# EAGLE board Proiect_TSC_board (EAGLE 9.7.0)
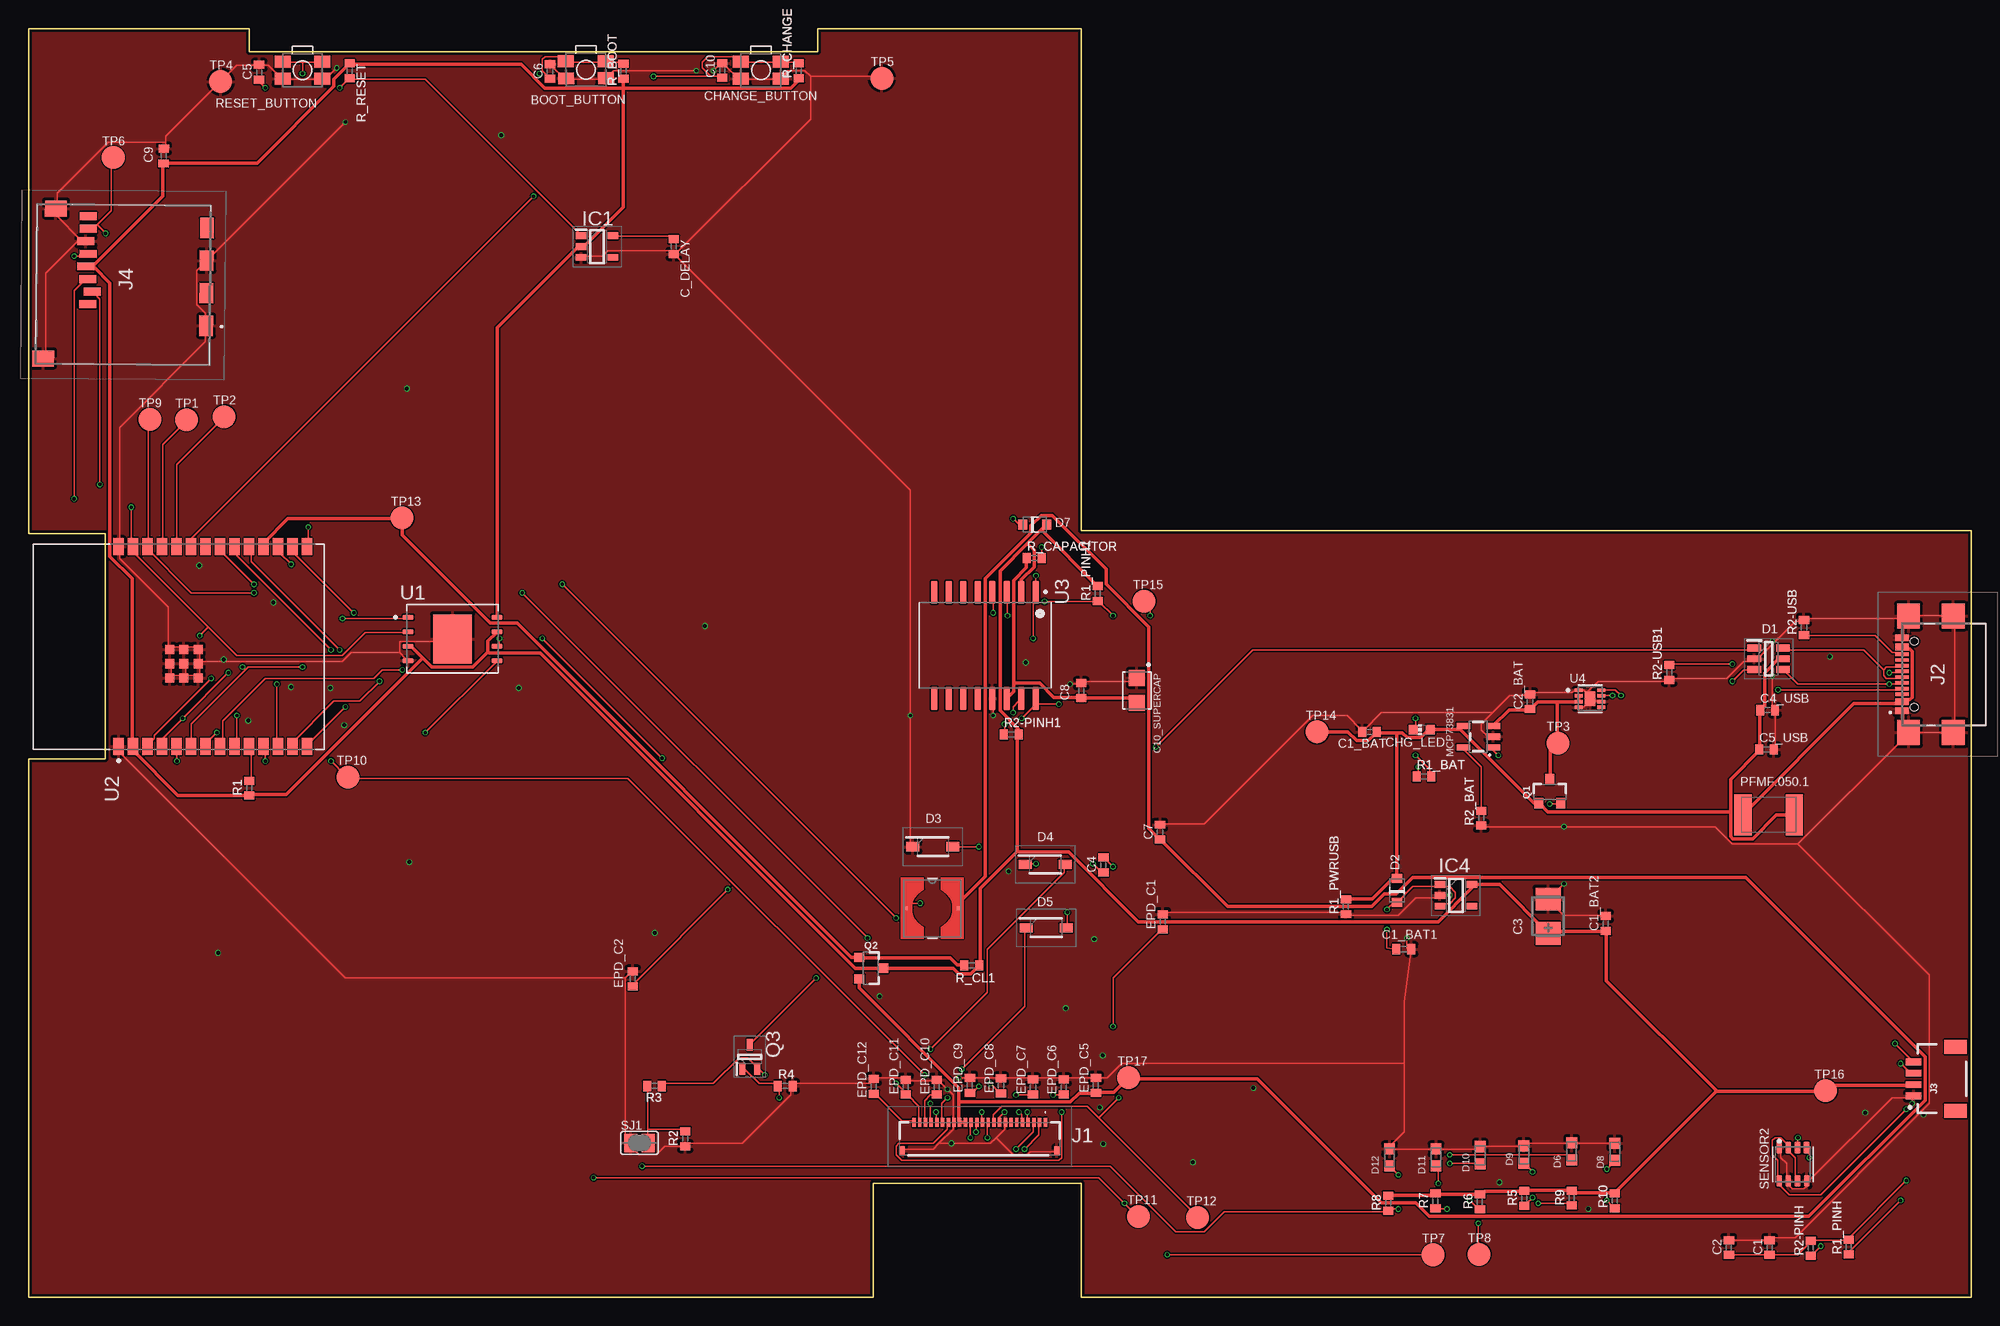
[diagram p0: board, top side]
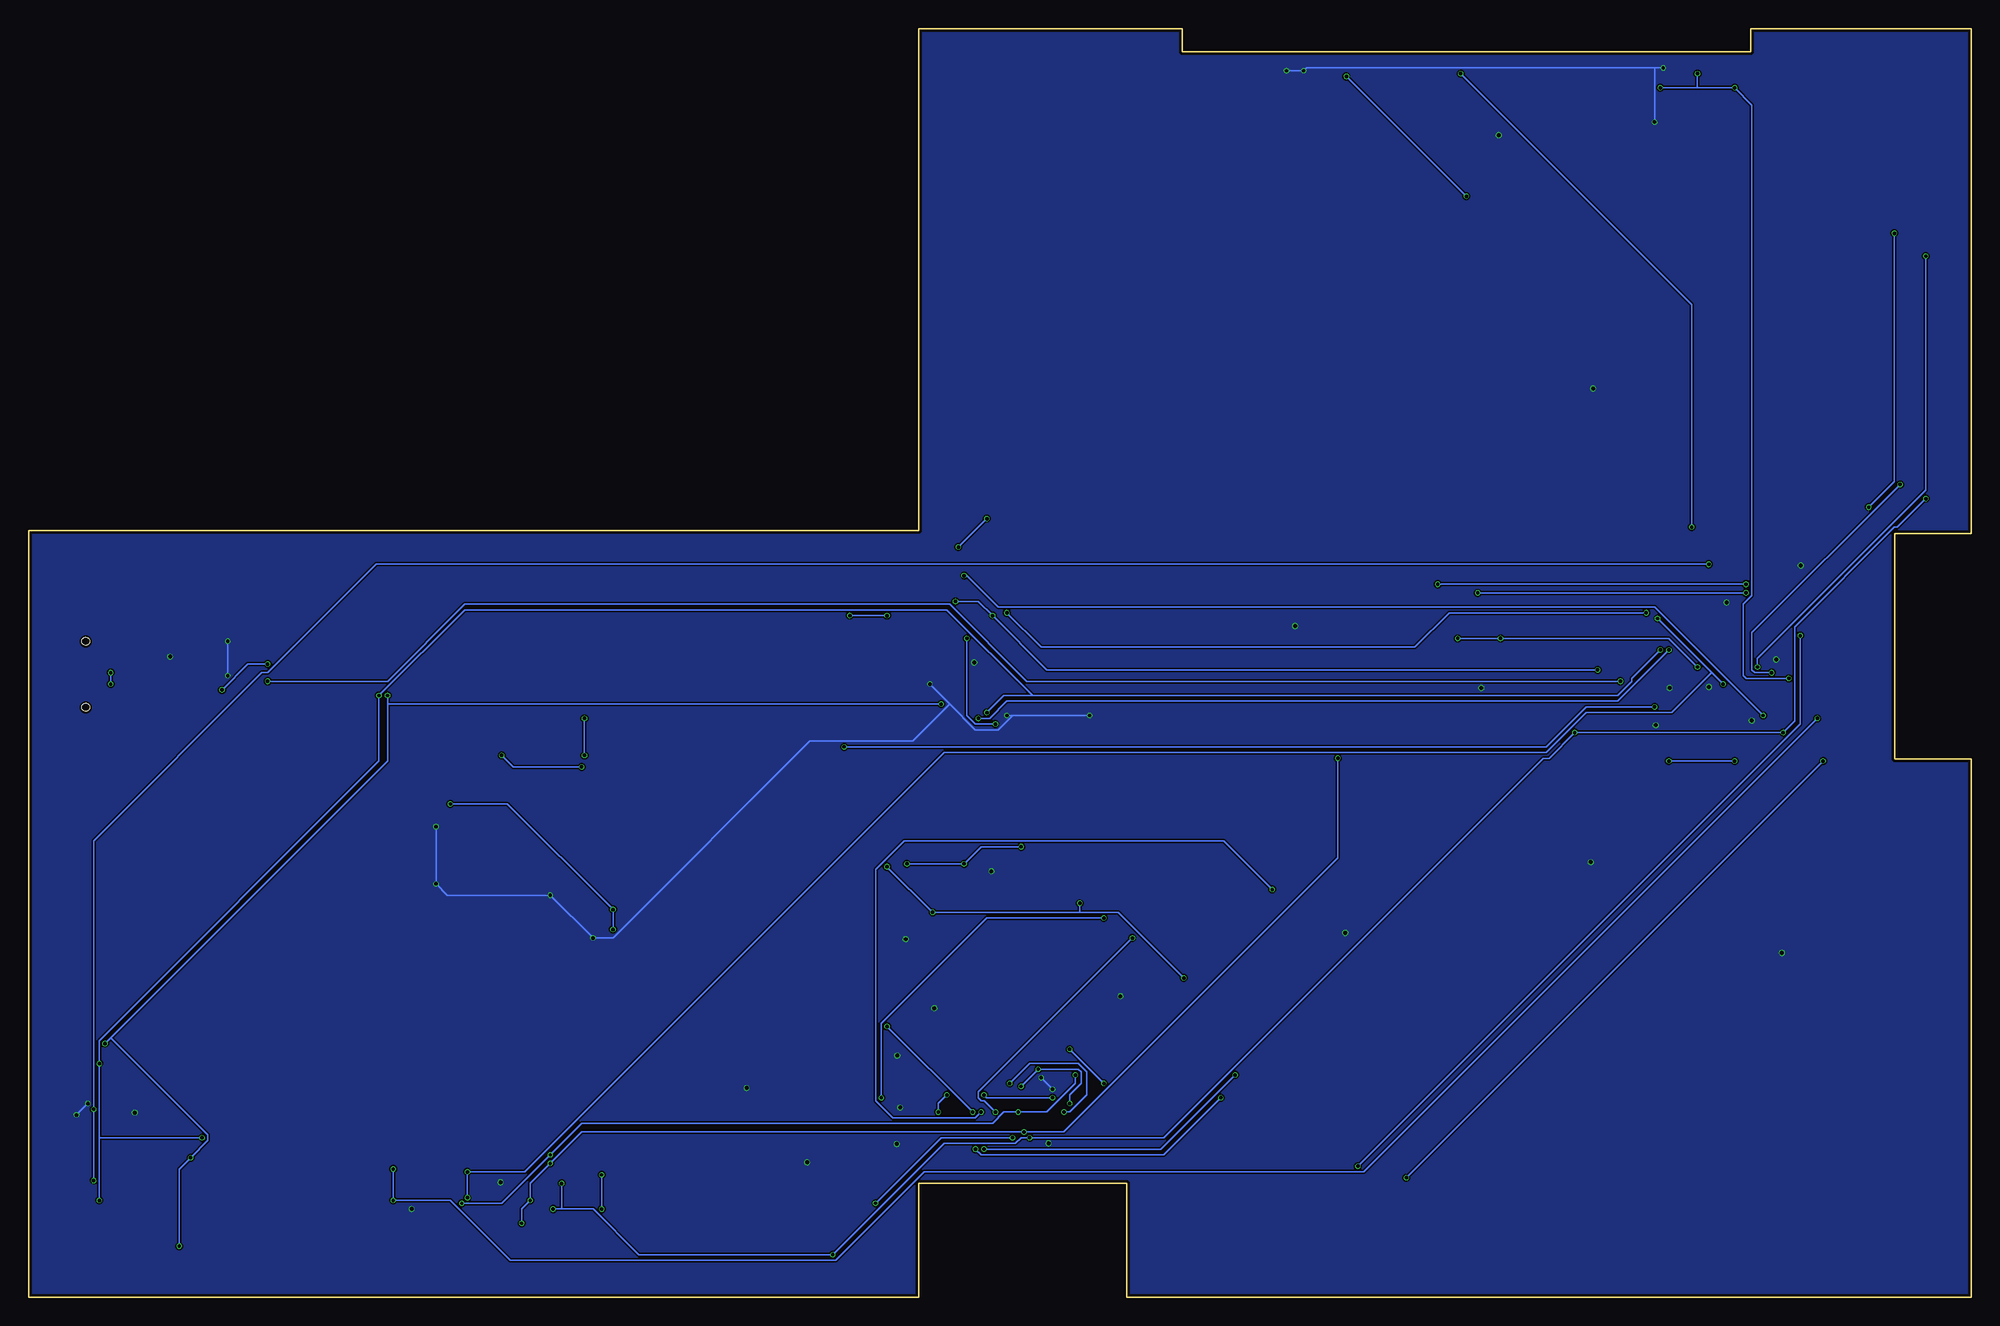
[diagram p1: board, bottom side, seen from below]

Size 170.2 x 111.2 mm. Coordinates in mm from the lower left corner, seen from the top.
Outline: 0,0 74,0 74,10 92.2,10 92.2,0 170.2,0 170.2,67.2 92.2,67.2 92.2,111.2 69.15,111.2 69.15,109.15 19.35,109.15 19.35,111.2 0,111.2 0,66.95 6.7,66.95 6.7,47.2 0,47.2 0,0
Copper layers (1*16): Top 0.035mm / dielectric 1.6mm / Bottom 0.035mm
Design rules "jlcpcb-2layers.dru *": minimum track width 5mil, minimum drill 0.3mm, track to track 5mil, track to pad 5mil, pad to pad 5mil, via to via 5mil, smd to smd 5mil, copper to edge 0.2mm, drill to drill 6mil, minimum pad ring 10mil, minimum via ring 3mil, stop-mask expansion 4mil, vias tented up to drill 0mil, thermal gap 10mil
Net classes: 0 default: width 0.15 mm; 1 POWER: width 0.3 mm

## Footprints (pad centres in the part's own frame; a part is rotated, then mirrored left to right if it is on the bottom)
MYBUTTON = smd 1.4 x 1.05: 1 1.75,0.75; 2 -1.75,0.75; 3 -1.75,-0.75; 4 1.75,-0.75
ESP32_WROVER_EAGLE-LTSPICE_C0402 = smd 0.7 x 0.9: 1 -0.65,0; 2 0.65,0
RCL_CT3528 = smd 2 x 2.2: + -1.5,0; - 1.5,0
CAPCP3225X100N = smd 1.4 x 1.4: 1 -1.1,0; 2 1.1,0
ADAFRUIT_CHIP-LED0603 = smd 0.8 x 0.8: A 0,-0.75; C 0,0.75
SOT95P280X145-6N = smd 1.2 x 0.6: 1 -1.25,0.95; 2 -1.25,0; 3 -1.25,-0.95; 4 1.25,-0.95; 5 1.25,0; 6 1.25,0.95
ESP32_WROVER_AVX---SD0805S020S1R0_AVX_SD0805S020S1R0_0 = smd 0.8 x 0.9: 1 -1.05,0; 2 1.05,0
SOD3716X135N = smd 1.15 x 0.8: 1 -1.75,0; 2 1.75,0
DIOC1608X36N = smd 0.97 x 0.94: 1 -0.75,0; 2 0.75,0
SOT95P280X125-5N = smd 0.9 x 0.6: 1 -1.4,0.95; 2 -1.4,0; 3 -1.4,-0.95; 4 1.4,-0.95; 5 1.4,0.95
SOT95P280X120-5N = smd 0.9 x 0.6: 1 -1.4,0.95; 2 -1.4,0; 3 -1.4,-0.95; 4 1.4,-0.95; 5 1.4,0.95
FH34SRJ24S05SH99 = smd 0.3 x 0.8: 1 5.75,1.45; 2 5.25,1.45; 3 4.75,1.45; 4 4.25,1.45; 5 3.75,1.45; 6 3.25,1.45; 7 2.75,1.45; 8 2.25,1.45; 9 1.75,1.45; 10 1.25,1.45; 11 0.75,1.45; 12 0.25,1.45; 13 -0.25,1.45; 14 -0.75,1.45; 15 -1.25,1.45; 16 -1.75,1.45; 17 -2.25,1.45; 18 -2.75,1.45; 19 -3.25,1.45; 20 -3.75,1.45; 21 -4.25,1.45; 22 -4.75,1.45; 23 -5.25,1.45; 24 -5.75,1.45 | smd 0.4 x 0.8: MP1 6.75,-1.05; MP2 -6.75,-1.05
SAMACSYS_PARTS_USB4110GFA = smd 0.3 x 1.15: A1 -3.35,3.678; A4 -2.55,3.678; A5 -1.25,3.678; A6 -0.25,3.678; A7 0.25,3.678; A8 1.25,3.678; A9 2.55,3.678; A12 3.35,3.678; B1 3.05,3.678; B4 2.25,3.678; B5 1.75,3.678; B6 0.75,3.678; B7 -0.75,3.678; B8 -1.75,3.678; B9 -2.25,3.678; B12 -3.05,3.678 | smd 2.18 x 2: MP1 -5.11,-0.827; MP2 5.11,-0.827; MP3 -5.11,3.103; MP4 5.11,3.103 | hole 0.65: -2.89,2.603; 2.89,2.603
JST04_1MM_RA = smd 0.6 x 1.35: 1 -1.5,0; 2 -0.5,0; 3 0.5,0; 4 1.5,0 | smd 1.2 x 2: NC1 2.8,-3.675; NC2 -2.8,-3.675
112ATAARR03ATTEND = smd 1.8 x 1.2: G1 10.6,10.4; G2 4.9,10.4; S1 7.75,10.4; S2 2.05,10.4 | smd 1.4 x 1.9: G3 13.6,-3.85; G4 0.45,-2.85 | smd 0.7 x 1.5: P1 8.8,0; P2 7.7,0.4; P3 6.6,0; P4 5.5,-0.2; P5 4.4,0; P6 3.3,-0.2; P7 2.2,0; P8 1.1,0
IND_4828-WE-TPC_WRE = smd 0.3 x 0.3: 1 -2.286,0; 2 2.286,0
ESP32_WROVER_SPARKFUN-IC-POWER_SOT23-5 = smd 0.55 x 1.2: 1 -0.95,-1.3; 2 0,-1.3; 3 0.95,-1.3; 4 0.95,1.3; 5 -0.95,1.3
ESP32C6_VARISTOR_CT/CN1812 = smd 1.5 x 3.6: 1 -2.25,0; 2 2.25,0
ESP32_WROVER_SPARKFUN-DISCRETESEMI_SOT23-3 = smd 0.8 x 0.9: 1 -0.95,-1; 2 0.95,-1; 3 0,1.1
SOT65P210X110-3N = smd 1.05 x 0.5: 1 -1.05,0.65; 2 -1.05,-0.65; 3 1.05,0
ESP32_WROVER_EAGLE-LTSPICE_R0402 = smd 0.7 x 0.9: 1 -0.65,0; 2 0.65,0
ESP32_WROVER_BME680_PSON80P300X300X100-8N = smd 1.016 x 0.5: 1 1.458,1.2; 2 1.458,0.4; 3 1.458,-0.4; 4 1.458,-1.2; 5 -1.458,-1.22; 6 -1.458,-0.4; 7 -1.458,0.4; 8 -1.458,1.2
SJ = smd 1.168 x 1.6: 1 -0.762,0; 2 0.762,0
TP20R = smd 2 x 2: TP 0,0
SON127P600X800X80-9N = smd 0.94 x 0.44: 1 -3.895,1.905; 2 -3.895,0.635; 3 -3.895,-0.635; 4 -3.895,-1.905; 5 3.895,-1.905; 6 3.895,-0.635; 7 3.895,0.635; 8 3.895,1.905 | smd 3.4 x 4.3: 9 0,0
XCVR_ESP32-C6-WROOM-1-N8 = smd 1.5 x 0.9: 1 -8.75,5.26; 2 -8.75,3.99; 3 -8.75,2.72; 4 -8.75,1.45; 5 -8.75,0.18; 6 -8.75,-1.09; 7 -8.75,-2.36; 8 -8.75,-3.63; 9 -8.75,-4.9; 10 -8.75,-6.17; 11 -8.75,-7.44; 12 -8.75,-8.71; 13 -8.75,-9.98; 14 -8.75,-11.25; 15 8.75,-11.25; 16 8.75,-9.98; 17 8.75,-8.71; 18 8.75,-7.44; 19 8.75,-6.17; 20 8.75,-4.9; 21 8.75,-3.63; 22 8.75,-2.36; 23 8.75,-1.09; 24 8.75,0.18; 25 8.75,1.45; 26 8.75,2.72; 27 8.75,3.99; 28 8.75,5.26 | smd 0.8 x 0.8: 29_1 -2.755,0.79; 29_2 -1.505,0.79; 29_3 -0.255,0.79; 29_4 -2.755,-0.46; 29_5 -1.505,-0.46; 29_6 -0.255,-0.46; 29_7 -2.755,-1.71; 29_8 -1.505,-1.71; 29_9 -0.255,-1.71
SOIC127P1032X265-16N = smd 2.05 x 0.59: 1 -4.655,4.445; 2 -4.655,3.175; 3 -4.655,1.905; 4 -4.655,0.635; 5 -4.655,-0.635; 6 -4.655,-1.905; 7 -4.655,-3.175; 8 -4.655,-4.445; 9 4.655,-4.445; 10 4.655,-3.175; 11 4.655,-1.905; 12 4.655,-0.635; 13 4.655,0.635; 14 4.655,1.905; 15 4.655,3.175; 16 4.655,4.445
SON50P200X200X80-9N = smd 0.76 x 0.305: 1 -0.985,0.75; 2 -0.985,0.25; 3 -0.985,-0.25; 4 -0.985,-0.75; 5 0.985,-0.75; 6 0.985,-0.25; 7 0.985,0.25; 8 0.985,0.75 | smd 0.9 x 1.3: 9 0,0

## Placement (x,y rotation side)
BOOT_BUTTON  BUTTON_CUSYOMV1  [MYBUTTON]  48.83,107.59 180.3 top
C1  100nF  [ESP32_WROVER_EAGLE-LTSPICE_C0402]  152.52,4.38 90 top
C1_BAT  4.7uF  [ESP32_WROVER_EAGLE-LTSPICE_C0402]  117.47,49.55 180 top
C1_BAT1  4.7uF  [ESP32_WROVER_EAGLE-LTSPICE_C0402]  120.48,30.52 0 top
C1_BAT2  4.7uF  [ESP32_WROVER_EAGLE-LTSPICE_C0402]  138.17,32.77 90 top
C2  100nF  [ESP32_WROVER_EAGLE-LTSPICE_C0402]  148.95,4.38 90 top
C2_BAT  4.7uF  [ESP32_WROVER_EAGLE-LTSPICE_C0402]  131.53,52.2 90 top
C3  100uF TANT  [RCL_CT3528]  133.11,33.4 90 top
C4  4.7uF/25V  [ESP32_WROVER_EAGLE-LTSPICE_C0402]  94.16,37.89 90 top
C4_USB  100nF  [ESP32_WROVER_EAGLE-LTSPICE_C0402]  152.34,51.47 0 top
C5  1uF  [ESP32_WROVER_EAGLE-LTSPICE_C0402]  20.2,107.36 90 top
C5_USB  4.7uF  [ESP32_WROVER_EAGLE-LTSPICE_C0402]  152.25,48.02 0 top
C6  100nF  [ESP32_WROVER_EAGLE-LTSPICE_C0402]  45.68,107.43 90 top
C7  10uF  [ESP32_WROVER_EAGLE-LTSPICE_C0402]  99.12,40.78 90 top
C8  100nF  [ESP32_WROVER_EAGLE-LTSPICE_C0402]  92.21,53.18 90 top
C9  100nF  [ESP32_WROVER_EAGLE-LTSPICE_C0402]  11.84,100.03 88.9 top
C10  100nF  [ESP32_WROVER_EAGLE-LTSPICE_C0402]  60.77,107.53 90 top
C10_SUPERCAP  CPH3225A  [CAPCP3225X100N]  97.09,53.19 270 top
C_DELAY  100nF  [ESP32_WROVER_EAGLE-LTSPICE_C0402]  56.52,92.09 270 top
CHANGE_BUTTON  BUTTON_CUSYOMV1  [MYBUTTON]  64.16,107.56 180 top
CHG_LED  [ADAFRUIT_CHIP-LED0603]  122.04,49.75 90 top
D1  USBLC6-2SC6Y  [SOT95P280X145-6N]  152.43,55.97 0 top
D2  ESP32_WROVER_AVX---SD0805S020S1R0_AVX_SD0805S020S1R0_0_0AVX_SD0805S020S1R0_0_0  [ESP32_WROVER_AVX---SD0805S020S1R0_AVX_SD0805S020S1R0_0]  119.88,35.68 90 top
D3  MBR0530  [SOD3716X135N]  79.22,39.5 0 top
D4  MBR0530  [SOD3716X135N]  89.06,37.95 0 top
D5  MBR0530  [SOD3716X135N]  89.15,32.4 0 top
D6  PGB1010603MR  [DIOC1608X36N]  135.18,12.82 90 top
D7  ESP32_WROVER_AVX---SD0805S020S1R0_AVX_SD0805S020S1R0_0_0AVX_SD0805S020S1R0_0_0  [ESP32_WROVER_AVX---SD0805S020S1R0_AVX_SD0805S020S1R0_0]  88.13,67.73 0 top
D8  PGB1010603MR  [DIOC1608X36N]  138.96,12.77 90 top
D9  PGB1010603MR  [DIOC1608X36N]  130.99,12.52 90 top
D10  PGB1010603MR  [DIOC1608X36N]  127.17,12.47 90 top
D11  PGB1010603MR  [DIOC1608X36N]  123.3,12.27 90 top
D12  PGB1010603MR  [DIOC1608X36N]  119.23,12.27 90 top
EPD_C1  1uF/50V  [ESP32_WROVER_EAGLE-LTSPICE_C0402]  99.36,32.92 90 top
EPD_C2  1uF/50V  [ESP32_WROVER_EAGLE-LTSPICE_C0402]  52.92,27.92 90 top
EPD_C5  0.1uF/50V  [ESP32_WROVER_EAGLE-LTSPICE_C0402]  93.5,18.59 90 top
EPD_C6  1uF/50V  [ESP32_WROVER_EAGLE-LTSPICE_C0402]  90.68,18.45 90 top
EPD_C7  1uF/50V  [ESP32_WROVER_EAGLE-LTSPICE_C0402]  87.99,18.45 90 top
EPD_C8  1uF/50V  [ESP32_WROVER_EAGLE-LTSPICE_C0402]  85.19,18.55 90 top
EPD_C9  1uF/50V  [ESP32_WROVER_EAGLE-LTSPICE_C0402]  82.46,18.6 90 top
EPD_C10  1uF/50V  [ESP32_WROVER_EAGLE-LTSPICE_C0402]  79.56,18.44 90 top
EPD_C11  1uF/50V  [ESP32_WROVER_EAGLE-LTSPICE_C0402]  76.84,18.44 90 top
EPD_C12  1uF/50V  [ESP32_WROVER_EAGLE-LTSPICE_C0402]  74.05,18.49 90 top
IC1  BD5229G-TR  [SOT95P280X125-5N]  49.8,92.09 0 top
IC4  XC6220A331MR-G  [SOT95P280X120-5N]  125.04,35.24 0 top
J1  FH34SRJ-24S-0.5SH_99_  [FH34SRJ24S05SH99]  83.32,13.89 0 top
J2  SAMACSYS_PARTS_USB4110-GF-A  [SAMACSYS_PARTS_USB4110GFA]  167.79,54.61 90 top
J3  QWIIC_RIGHT_ANGLE  [JST04_1MM_RA]  165.12,19.16 90 top
J4  112A-TAAR-R03_ATTEND  [112ATAARR03ATTEND]  5.25,95.85 269.5 top
L1  68uH  [IND_4828-WE-TPC_WRE]  79.17,34.1 0 top
MCP73831  ESP32_WROVER_SPARKFUN-IC-POWER_MCP73831  [ESP32_WROVER_SPARKFUN-IC-POWER_SOT23-5]  127,49.14 90 top
PFMF.050.1  ESP32C6_VARISTORCN1812  [ESP32C6_VARISTOR_CT/CN1812]  152.44,42.3 0 top
Q1  20V/4.2A/52mΩ/1.4W  [ESP32_WROVER_SPARKFUN-DISCRETESEMI_SOT23-3]  133.26,44.31 0 top
Q2  20V/4.2A/52mΩ/1.4W  [ESP32_WROVER_SPARKFUN-DISCRETESEMI_SOT23-3]  73.78,28.86 270 top
Q3  SI1308EDL-T1-GE3  [SOT65P210X110-3N]  63.18,21.1 90 top
R1  10K  [ESP32_WROVER_EAGLE-LTSPICE_R0402]  19.33,44.63 90 top
R1_BAT  200  [ESP32_WROVER_EAGLE-LTSPICE_R0402]  122.24,45.65 0 top
R1_PINH  10K  [ESP32_WROVER_EAGLE-LTSPICE_R0402]  159.46,4.42 90 top
R1_PINH1  10K  [ESP32_WROVER_EAGLE-LTSPICE_R0402]  93.66,61.69 90 top
R1_PWRUSB  100K  [ESP32_WROVER_EAGLE-LTSPICE_R0402]  115.4,34.24 90 top
R2  2.2  [ESP32_WROVER_EAGLE-LTSPICE_R0402]  57.52,13.91 90 top
R2-PINH  10K  [ESP32_WROVER_EAGLE-LTSPICE_R0402]  156.13,4.32 90 top
R2-PINH1  10K  [ESP32_WROVER_EAGLE-LTSPICE_R0402]  86.08,49.34 0 top
R2-USB  5k1  [ESP32_WROVER_EAGLE-LTSPICE_R0402]  155.53,58.72 90 top
R2-USB1  5k1  [ESP32_WROVER_EAGLE-LTSPICE_R0402]  143.72,54.77 90 top
R2_BAT  2K  [ESP32_WROVER_EAGLE-LTSPICE_R0402]  127.25,42 90 top
R3  0.47  [ESP32_WROVER_EAGLE-LTSPICE_R0402]  54.84,18.53 180 top
R4  10K  [ESP32_WROVER_EAGLE-LTSPICE_R0402]  66.3,18.53 0 top
R5  10K  [ESP32_WROVER_EAGLE-LTSPICE_R0402]  131.02,8.68 90 top
R6  10K  [ESP32_WROVER_EAGLE-LTSPICE_R0402]  127.14,8.38 90 top
R7  10K  [ESP32_WROVER_EAGLE-LTSPICE_R0402]  123.24,8.46 90 top
R8  10K  [ESP32_WROVER_EAGLE-LTSPICE_R0402]  119.11,8.26 90 top
R9  10K  [ESP32_WROVER_EAGLE-LTSPICE_R0402]  135.18,8.71 90 top
R10  10K  [ESP32_WROVER_EAGLE-LTSPICE_R0402]  138.96,8.48 90 top
R_BOOT  10K  [ESP32_WROVER_EAGLE-LTSPICE_R0402]  52.12,107.47 90 top
R_CAPACITOR  15  [ESP32_WROVER_EAGLE-LTSPICE_R0402]  88.1,64.79 0 top
R_CHANGE  10K  [ESP32_WROVER_EAGLE-LTSPICE_R0402]  67.47,107.49 90 top
R_CL1  10K  [ESP32_WROVER_EAGLE-LTSPICE_R0402]  82.63,29.1 180 top
R_RESET  10K  [ESP32_WROVER_EAGLE-LTSPICE_R0402]  28.14,107.49 270 top
RESET_BUTTON  BUTTON_CUSYOMV1  [MYBUTTON]  24,107.56 180 top
SENSOR2  BME688  [ESP32_WROVER_BME680_PSON80P300X300X100-8N]  154.56,11.67 90 top
SJ1  [SJ]  53.52,13.54 0 top
TP1  TPTP20R  [TP20R]  13.84,76.91 0 top
TP2  TPTP20R  [TP20R]  17.14,77.19 0 top
TP3  TPTP20R  [TP20R]  133.96,48.59 0 top
TP4  TPTP20R  [TP20R]  16.83,106.54 0 top
TP5  TPTP20R  [TP20R]  74.75,106.84 0 top
TP6  TPTP20R  [TP20R]  7.42,99.89 0 top
TP7  TPTP20R  [TP20R]  123.04,3.74 0 top
TP8  TPTP20R  [TP20R]  127.06,3.77 0 top
TP9  TPTP20R  [TP20R]  10.63,76.94 0 top
TP10  TPTP20R  [TP20R]  27.97,45.61 0 top
TP11  TPTP20R  [TP20R]  97.22,7.11 0 top
TP12  TPTP20R  [TP20R]  102.42,7.01 0 top
TP13  TPTP20R  [TP20R]  32.72,68.31 0 top
TP14  TPTP20R  [TP20R]  112.87,49.56 0 top
TP15  TPTP20R  [TP20R]  97.72,61.01 0 top
TP16  TPTP20R  [TP20R]  157.42,18.11 0 top
TP17  TPTP20R  [TP20R]  96.37,19.26 0 top
U1  W25Q512JVEIQ  [SON127P600X800X80-9N]  37.14,57.71 0 top
U2  ESP32-C6-WROOM-1-N8  [XCVR_ESP32-C6-WROOM-1-N8]  13.15,57.04 90 top
U3  DS3231SN#  [SOIC127P1032X265-16N]  83.8,57.15 270 top
U4  MAX17048G+T10  [SON50P200X200X80-9N]  136.79,52.47 0 top

## Library data of the parts
BOOT_BUTTON CHANGE_BUTTON CHG_LED PFMF.050.1 RESET_BUTTON SJ1 TP1-TP17 = deskassistant_v19_v1
C1 C1_BAT C1_BAT1 C1_BAT2 C2 C2_BAT C4 C4_USB C5 C5_USB C6-C10 C_DELAY EPD_C1 EPD_C2 EPD_C5-EPD_C12 = deskassistant_v19_v1; SPICEMODEL: NONE; SPICEPREFIX: C
C3 = deskassistant_v19_v1; SPICEPREFIX: C
C10_SUPERCAP = deskassistant_v19_v1; AVAILABILITY: Not in stock; CHECK_PRICES: https://www.snapeda.com/parts/CPH3225A/Seiko+Instruments/view-part/?ref=eda; DESCRIPTION: 11 mF (EDLC) Supercapacitor 3.3 V 1210 (3225 Metric) - -; MF: Seiko Instruments; MP: CPH3225A; PACKAGE: 1210 Seiko; PRICE: None; PURCHASE-URL: https://www.snapeda.com/api/url_track_click_mouser/?unipart_id=562593&manufacturer=Seiko Instruments&part_name=CPH3225A&search_term=None; SNAPEDA_LINK: https://www.snapeda.com/parts/CPH3225A/Seiko+Instruments/view-part/?ref=snap
D1 = deskassistant_v19_v1; AVAILABILITY: In Stock; CHECK_PRICES: https://www.snapeda.com/parts/USBLC6-2SC6Y/STMicroelectronics/view-part/?ref=eda; DESCRIPTION: 17V Clamp 5A (8/20µs) Ipp Tvs Diode Surface Mount SOT-23-6; MF: STMicroelectronics; MP: USBLC6-2SC6Y; PACKAGE: SOT-23-6 STMicroelectronics; PRICE: None; SNAPEDA_LINK: https://www.snapeda.com/parts/USBLC6-2SC6Y/STMicroelectronics/view-part/?ref=snap
D2 D7 = deskassistant_v19_v1; CENTROID_NOT_SPECIFIED: No; DATASHEET: http://datasheets.avx.com/schottky.pdf; DIGIKEY_DESCRIPTION: DIODE SCHOTTKY 20V 1A 0805; DIGIKEY_PART_NUMBER: 478-7800-1-ND; LEAD_FREE: yes; MF: AVX; MOUSER_PART_NUMBER: 581-SD0805S020S1R0; PACKAGE: 0805 (2012 metric); PREFIX: D; ROHS: yes; TEMPERATURE_RANGE_HIGH: +125°C; TEMPERATURE_RANGE_LOW: -55°C
D3-D5 = deskassistant_v19_v1; AVAILABILITY: In Stock; CHECK_PRICES: https://www.snapeda.com/parts/MBR0530/Onsemi/view-part/?ref=eda; DESCRIPTION: Diode Schottky 30 V 500mA Surface Mount SOD-123; MF: ON Semiconductor; MP: MBR0530; PACKAGE: SOD-123-2 ON Semiconductor; PRICE: None; PURCHASE-URL: https://www.snapeda.com/api/url_track_click_mouser/?unipart_id=179458&manufacturer=ON Semiconductor&part_name=MBR0530&search_term=None; SNAPEDA_LINK: https://www.snapeda.com/parts/MBR0530/Onsemi/view-part/?ref=snap
D6 D8-D12 = deskassistant_v19_v1; AVAILABILITY: In Stock; CHECK_PRICES: https://www.snapeda.com/parts/PGB1010603MR/Littelfuse/view-part/?ref=eda; DESCRIPTION: 150V (Typ) Clamp - Ipp Tvs Diode Surface Mount 0603 (1608 Metric); MF: Littelfuse Inc.; MP: PGB1010603MR; PACKAGE: 0603 Littelfuse Inc.; PRICE: None; PURCHASE-URL: https://www.snapeda.com/api/url_track_click_mouser/?unipart_id=5659453&manufacturer=Littelfuse Inc.&part_name=PGB1010603MR&search_term=None; SNAPEDA_LINK: https://www.snapeda.com/parts/PGB1010603MR/Littelfuse/view-part/?ref=snap
IC1 = deskassistant_v19_v1; DESCRIPTION: Voltage Detector with Adjustable Delay Time: CMOS processes are utilized to develop high precision, low current consumption CMOS reset ICs that allow arbitrary setting of the delay time. The extensive lineup includes both Nch Open Drain and CMOS output types in a wide range of detection voltages (from 2.3V to 6.0V, in 0.1V steps), enabling selection of the ideal solution based on customer requirements. In addition, the entire series is of course both lead-free and RoHS-compliant.; HEIGHT: 1.25mm; MANUFACTURER_NAME: ROHM Semiconductor; MANUFACTURER_PART_NUMBER: BD5229G-TR; MOUSER_PART_NUMBER: 755-BD5229G-TR; MOUSER_PRICE-STOCK: https://www.mouser.co.uk/ProductDetail/ROHM-Semiconductor/BD5229G-TR?qs=4kLU8WoGk0vvnhrrYwdszw%3D%3D
IC4 = deskassistant_v19_v1; DESCRIPTION: LDO Voltage Regulators; HEIGHT: 1.2mm; MANUFACTURER_NAME: Torex; MANUFACTURER_PART_NUMBER: XC6220A331MR-G; MOUSER_PART_NUMBER: 865-XC6220A331MR-G; MOUSER_PRICE-STOCK: https://www.mouser.co.uk/ProductDetail/Torex-Semiconductor/XC6220A331MR-G?qs=AsjdqWjXhJ8ZSWznL1J0gg%3D%3D
J1 = deskassistant_v19_v1; DESCRIPTION: 24 Position FFC, FPC Connector Contacts, Top and Bottom 0.020" (0.50mm) Surface Mount, Right Angle; HEIGHT: 1.1mm; MANUFACTURER_NAME: Hirose; MANUFACTURER_PART_NUMBER: FH34SRJ-24S-0.5SH(99); MOUSER_PART_NUMBER: 798-FH34SRJ24S05SH99; MOUSER_PRICE-STOCK: https://www.mouser.co.uk/ProductDetail/Hirose-Connector/FH34SRJ-24S-0.5SH99?qs=vcbW%252B4%252BSTIpKBl5ap9J8Fw%3D%3D
J2 = deskassistant_v19_v1; DESCRIPTION: CONN USB 2.0 TYPE-C R/A SMT; HEIGHT: 3.26mm; MANUFACTURER_NAME: GCT (GLOBAL CONNECTOR TECHNOLOGY); MANUFACTURER_PART_NUMBER: USB4110-GF-A; MOUSER_PART_NUMBER: 640-USB4110-GF-A; MOUSER_PRICE-STOCK: https://www.mouser.co.uk/ProductDetail/GCT/USB4110-GF-A?qs=KUoIvG%2F9IlYiZvIXQjyJeA%3D%3D
J3 = deskassistant_v19_v1; PROD_ID: CONN-13694
J4 = deskassistant_v19_v1; DESCRIPTION: Micro SD Card Socket, Push-Push Type, Top Mount, SMT, H=1.83mm, 10u; HEIGHT: 1.9mm; MANUFACTURER_NAME: ATTEND; MANUFACTURER_PART_NUMBER: 112A-TAAR-R03 ATTEND
L1 = deskassistant_v19_v1; COPYRIGHT: Copyright (C) 2024 Ultra Librarian. All rights reserved.; MANUFACTURER_PART_NUMBER: 744043680; MFR_NAME: Wurth Electronics
MCP73831 = deskassistant_v19_v1; PROD_ID: IC-09995
Q1 = deskassistant_v19_v1; PROD_ID: TRAN-14388
Q2 = deskassistant_v19_v1; PROD_ID: TRAN-14388; THERMALLOSS: 2305 UX
Q3 = deskassistant_v19_v1; AVAILABILITY: In Stock; CHECK_PRICES: https://www.snapeda.com/parts/SI1308EDL-T1-GE3/Vishay+Siliconix/view-part/?ref=eda; DESCRIPTION: Si1308EDL-T1-GE3 N-channel MOSFET Transistor, 1.5 A, 30 V, 3-Pin SC-70 | Siliconix / Vishay SI1308EDL-T1-GE3; MF: Vishay Siliconix; MP: SI1308EDL-T1-GE3; PACKAGE: SOT-323 Vishay Semiconductor; PRICE: None; PURCHASE-URL: https://www.snapeda.com/api/url_track_click_mouser/?unipart_id=274603&manufacturer=Vishay Siliconix&part_name=SI1308EDL-T1-GE3&search_term=None; SNAPEDA_LINK: https://www.snapeda.com/parts/SI1308EDL-T1-GE3/Vishay+Siliconix/view-part/?ref=snap
R1 R1_BAT R1_PINH R1_PINH1 R1_PWRUSB R2 R2-PINH R2-PINH1 R2-USB R2-USB1 R2_BAT R3-R10 R_BOOT R_CAPACITOR R_CHANGE R_CL1 R_RESET = deskassistant_v19_v1; SPICEMODEL: NONE; SPICEPREFIX: R
SENSOR2 = deskassistant_v19_v1; AVAILABILITY: Unavailable; DESCRIPTION: Integrated Environmental Unit; MF: Bosch Sensortec; MP: BME680; PACKAGE: LGA-8 Bosch Tools; PRICE: None
U1 = deskassistant_v19_v1; AVAILABILITY: In Stock; CHECK_PRICES: https://www.snapeda.com/parts/W25Q512JVEIQ/Winbond+Electronics/view-part/?ref=eda; DESCRIPTION: FLASH - NOR Memory IC 512Mb (64M x 8) SPI - Quad I/O 133 MHz 8-WSON (8x6); MF: Winbond Electronics; MP: W25Q512JVEIQ; PACKAGE: Package; PRICE: None; SNAPEDA_LINK: https://www.snapeda.com/parts/W25Q512JVEIQ/Winbond+Electronics/view-part/?ref=snap
U2 = deskassistant_v19_v1; AVAILABILITY: In Stock; CHECK_PRICES: https://www.snapeda.com/parts/ESP32-C6-WROOM-1-N8/Espressif+Systems/view-part/?ref=eda; DESCRIPTION: Multiprotocol Modules ESP32-C6 module, Wi-Fi 6 in 2.4 GHz band, Bluetooth 5, Zigbee 3.0 and Thread. ESP34-WROOM Compatible - ENGINEERING SAMPLE; MF: Espressif Systems; MP: ESP32-C6-WROOM-1-N8; PACKAGE: None; PRICE: None; SNAPEDA_LINK: https://www.snapeda.com/parts/ESP32-C6-WROOM-1-N8/Espressif+Systems/view-part/?ref=snap
U3 = deskassistant_v19_v1; AVAILABILITY: In Stock; CHECK_PRICES: https://www.snapeda.com/parts/DS3231SN%23/Analog+Devices/view-part/?ref=eda; DESCRIPTION: Extremely Accurate I²C-Integrated RTC/TCXO/Crystal; MF: Analog Devices; MP: DS3231SN#; PACKAGE: SOIC-16 Maxim; PRICE: None; PURCHASE-URL: https://www.snapeda.com/api/url_track_click_mouser/?unipart_id=99048&manufacturer=Analog Devices&part_name=DS3231SN#&search_term=None; SNAPEDA_LINK: https://www.snapeda.com/parts/DS3231SN%23/Analog+Devices/view-part/?ref=snap
U4 = deskassistant_v19_v1; AVAILABILITY: In Stock; CHECK_PRICES: https://www.snapeda.com/parts/MAX17048G+T10/Analog+Devices/view-part/?ref=eda; DESCRIPTION: 3µA 1-Cell/2-Cell Fuel Gauge with ModelGauge; MF: Analog Devices; MP: MAX17048G+T10; PACKAGE: TDFN-8 Maxim; PRICE: None; PURCHASE-URL: https://www.snapeda.com/api/url_track_click_mouser/?unipart_id=329239&manufacturer=Analog Devices&part_name=MAX17048G+T10&search_term=None; SNAPEDA_LINK: https://www.snapeda.com/parts/MAX17048G+T10/Analog+Devices/view-part/?ref=snap

## Nets
3V3 [POWER]: C1_BAT2.1 C3.+ C9.1 D7.2 IC1.2 IC4.5 J3.2 J4.P4 Q2.3 R1.1 R1_PINH1.2 R2-PINH1.2 R5.2 R6.2 R7.2 R8.2 R9.2 R10.2 R_BOOT.1 R_CHANGE.1 R_CL1.1 R_RESET.1 TP16.TP U1.3 U1.7 U1.8 U2.2 U3.2
32KHZ: R2-PINH1.1 U2.9 U3.1
DN: D1.4 J2.A7 J2.B7
DP: D1.6 J2.A6 J2.B6
EPD_3V3 [POWER]: C7.1 EPD_C5.1 J1.15 J1.16 L1.2 Q2.2 TP17.TP
EPD_3V3_C [POWER]: Q2.1 R_CL1.2 TP13.TP U2.18
EPD_BUSY: J1.9 TP9.TP U2.26
EPD_CS: D6.1 J1.12 R9.1 TP10.TP U2.11
EPD_DC: J1.11 TP11.TP U2.5
EPD_RST: J1.10 TP12.TP U2.21
FLASH_CS: D9.1 R5.1 U1.1 U2.12
GDR: J1.2 Q3.1 R4.1
GND: BOOT_BUTTON.1 BOOT_BUTTON.2 C1.2 C1_BAT1.2 C1_BAT2.2 C1_BAT.2 C2.2 C2_BAT.2 C3.- C4_USB.2 C5.2 C5_USB.2 C6.2 C7.2 C8.2 C9.2 C10.2 C10_SUPERCAP.1 C_DELAY.2 CHANGE_BUTTON.1 CHANGE_BUTTON.2 D1.2 D3.1 D6.2 D8.2 D9.2 D10.2 D11.2 D12.2 EPD_C1.2 EPD_C2.2 EPD_C5.2 EPD_C6.2 EPD_C7.2 EPD_C8.2 EPD_C9.2 EPD_C10.2 EPD_C11.2 EPD_C12.2 IC1.3 IC4.2 J1.8 J1.17 J1.MP1 J1.MP2 J2.A1 J2.A12 J2.B1 J2.B12 J2.MP1 J2.MP2 J2.MP3 J2.MP4 J3.1 J4.G1 J4.G2 J4.G3 J4.G4 J4.P6 MCP73831.2 R1_PWRUSB.1 R2-USB1.1 R2-USB.2 R2.1 R2_BAT.1 R4.2 RESET_BUTTON.1 RESET_BUTTON.2 SENSOR2.1 SENSOR2.5 SENSOR2.7 SJ1.1 TP4.TP TP5.TP U1.4 U1.9 U2.1 U2.28 U2.29_1 U2.29_2 U2.29_3 U2.29_4 U2.29_5 U2.29_6 U2.29_7 U2.29_8 U2.29_9 U3.13 U4.1 U4.4 U4.6 U4.9
GPIO8: R1.2 U2.10
I2C_PW: C1.1 C2.1 R1_PINH.2 R2-PINH.2 SENSOR2.2 SENSOR2.6 SENSOR2.8 U2.17
INT_RTC: R1_PINH1.1 TP15.TP U2.8 U3.3
IO/BOOT: BOOT_BUTTON.3 BOOT_BUTTON.4 C6.1 R_BOOT.2 U2.15
IO/CHANGE: C10.1 CHANGE_BUTTON.3 CHANGE_BUTTON.4 R_CHANGE.2 U2.23
MISO: D12.1 J4.P7 R8.1 TP6.TP U1.2 U2.27
MOSI: D11.1 J1.14 J4.P3 R7.1 TP7.TP U1.5 U2.7
N$1: J2.A5 R2-USB1.2
N$2: J2.B5 R2-USB.1
N$3: C1_BAT1.1 D2.1 IC4.1 IC4.3 Q1.2
N$4: C4.1 D3.2 D4.1
N$6: MCP73831.1 R1_BAT.1
N$7: CHG_LED.C R1_BAT.2
N$8: MCP73831.5 R2_BAT.2
N$9: EPD_C12.1 J1.24
N$10: EPD_C10.1 J1.22
N$11: EPD_C8.1 J1.20
N$12: EPD_C7.1 J1.19
N$13: EPD_C6.1 J1.18
N$14: EPD_C2.1 J1.5
N$15: EPD_C1.1 J1.4
N$16: D7.1 R_CAPACITOR.2
N$17: C_DELAY.1 IC1.5
PREVGH: D5.1 EPD_C9.1 J1.21
PREVGL: D4.2 EPD_C11.1 J1.23
RESE: J1.3 Q3.2 R3.1
RESE': R2.2 R3.2 SJ1.2
RESET: C5.1 IC1.1 R_RESET.2 RESET_BUTTON.3 RESET_BUTTON.4 U2.3
RTC_RST: U2.16 U3.4
RX: TP2.TP U2.24
SCK: D10.1 J1.13 J4.P5 R6.1 TP8.TP U1.6 U2.6
SCL: J3.4 R2-PINH.1 SENSOR2.4 U2.20 U3.16 U4.7
SDA: J3.3 R1_PINH.1 SENSOR2.3 U2.19 U3.15 U4.8
SRC: C4.2 D5.2 L1.1 Q3.3
SS_SD: D8.1 J4.P2 R10.1 U2.4
TX: TP1.TP U2.25
USB_D+: D1.1 U2.14
USB_D-: D1.3 U2.13
VBAT [POWER]: C2_BAT.1 MCP73831.3 Q1.3 TP3.TP U4.2 U4.3
VBUS [POWER]: C1_BAT.1 C4_USB.1 C5_USB.1 CHG_LED.A D1.5 D2.2 MCP73831.4 PFMF.050.1.2 Q1.1 R1_PWRUSB.2 TP14.TP
VRTC [POWER]: C8.1 C10_SUPERCAP.2 R_CAPACITOR.1 U3.14
VUSB [POWER]: J2.A4 J2.A9 J2.B4 J2.B9 PFMF.050.1.1

## Tracks (layer width: path | path; a pad name or v marks a point on that pad's centre or on a via)
3V3
  Top 0.3: 34.52,56.03 35.32,55.23 38.92,55.23 40.23,56.55 | 34.52,56.03 33.52,57.03 33.31,57.03 U1.3 | 40.23,56.55 40.23,57.52 41,58.28 U1.7 | 34.52,56.03 22.58,44.08 19.46,44.08 R1.1 19.32,44.01 13.09,44.01 9.21,47.89 9.21,48.24 U2.2 9.07,48.37 9.07,62.99 7.13,64.92 7.13,88.89 5.75,90.27 J4.P4 5.05,90.41 5.68,90.41 11.77,96.5 11.77,99.34 C9.1 11.98,99.41 20.01,99.41 26.73,106.13 26.73,106.75 28.12,108.14 R_RESET.1 28.25,108.07 43.14,108.07 45.22,105.99 52.08,105.99 | 52.08,105.99 52.08,106.75 R_BOOT.1 | 52.08,105.99 52.08,95.53 48.68,92.14 48.41,92.14 IC1.2 48.27,92.21 41.06,85.01 41.06,59.66 U1.8 | 52.08,105.99 66.76,105.99 67.45,106.68 67.45,106.82 R_CHANGE.1 | 88.71,67.28 89.12,67.69 D7.2 | 88.71,67.28 87.5,66.07 | 87.5,66.07 85.11,63.68 85.11,51.42 86.7,49.83 86.7,49.34 R2-PINH1.2 86.63,49.2 86.63,39.09 | 88.71,67.28 93.63,62.36 R1_PINH1.2 | 87.5,66.07 88.09,65.48 88.09,64.03 86.98,62.92 U3.2 | 86.63,39.09 83.38,35.84 83.38,29.19 R_CL1.1 83.24,29.05 82.55,28.36 81.51,28.36 81.02,28.85 74.93,28.85 Q2.3 74.72,28.85 72.44,28.85 44.8,56.48 40.37,56.48 40.23,56.55 | J3.2 165.09,18.6 157.96,18.6 157.47,18.11 TP16.TP 157.34,18.04 147.85,18.04 | R8.2 119.11,8.97 123.06,8.97 123.2,9.11 R7.2 123.33,9.04 127.07,9.04 R6.2 127.28,9.04 127.56,9.32 130.95,9.32 R5.2 131.16,9.39 135.04,9.39 R9.2 135.25,9.32 135.38,9.18 138.92,9.18 R10.2 139.05,9.25 147.85,18.04 | 147.85,18.04 147.78,18.18 138.22,27.74 138.22,31.96 C1_BAT2.1 138.15,32.1 133.17,32.1 C3.+ 133.1,31.96 128.87,36.19 IC4.5 126.38,36.05 126.38,35.84 123.47,32.93 97.23,32.93 91.13,39.02 86.77,39.02 86.63,39.09
32KHZ  (via drill 0.3)
  Top 0.15: v85.5,50.25 85.5,49.5 R2-PINH1.1 | v88,57.75 88,61.75 U3.1 88.25,62 v88.25,63.25 | v18.25,51 18.25,48.5 U2.9
  Bottom 0.15: v85.5,50.25 87.25,50.25 88,51 v88,57.75 | v18.25,51 27.75,60.5 85.25,60.5 88,63.25 v88.25,63.25
DN  (via drill 0.3)
  Top 0.15: J2.B7 164,53.75 v163,53.75 155,53.75 153.75,55 D1.4 | v163,54.75 164,54.75 J2.A7
  Bottom 0.15: v163,53.75 v163,54.75
DP
  Top 0.15: 162.5,55 162.5,54.5 162.75,54.25 164,54.25 J2.A6 | 162.5,55 162.75,55.25 164,55.25 J2.B6 | 162.5,55 160.75,56.75 153.75,56.75 D1.6
EPD_3V3
  Top 0.3: J1.15 J1.16 81.51,15.48 81.51,17.14 | 81.51,17.14 81.51,18.39 72.78,27.11 72.78,27.88 Q2.2 | 81.51,17.14 91.27,17.14 92.03,17.9 93.35,17.9 EPD_C5.1 93.56,17.97 95.08,17.97 96.33,19.22 TP17.TP 96.47,19.15 107.61,19.15 118.49,8.28 121.53,8.28 122.71,7.1 155.95,7.1 166.13,17.28 166.13,21.09 150.41,36.81 121.26,36.81 119.8,35.36 118.76,35.36 117.66,34.25 105.05,34.25 99.23,40.06 C7.1 99.1,40.13 98.13,41.1 98.13,58.76 94.39,62.5 94.39,63.82 89.68,68.53 88.71,68.53 87.81,67.63 87.81,67 83.79,62.99 83.79,36.88 81.51,34.59 81.51,34.11 L1.2
EPD_3V3_C
  Top 0.3: R_CL1.2 81.92,29.12 81.37,29.12 80.75,29.75 72.78,29.75 Q2.1 72.64,29.82 72.09,29.82 42.8,59.11 40.44,59.11 32.76,66.79 32.76,68.11 TP13.TP 32.69,68.25 22.71,68.25 20.64,66.17 20.64,65.83 U2.18
EPD_BUSY  (via drill 0.3)
  Top 0.15: v85.5,16.25 85,15.75 85,15.5 J1.9 | v43.25,61.75 v73.5,31.5 | v19.75,61.75 14.25,61.75 10.25,65.75 U2.26 10.5,66 10.5,76.75 TP9.TP
  Bottom 0.15: v85.5,16.25 86.5,17.25 86.75,17.25 87,17.5 87,18 v73.5,31.5 | v19.75,61.75 v43.25,61.75
EPD_CS  (via drill 0.3)
  Top 0.15: v20.75,47 20.75,48.25 U2.11 | v26.5,47 27.75,45.75 TP10.TP 28,45.5 52.5,45.5 v78.5,19.5 | v83.5,16.25 83.5,15.5 J1.12 | v124.5,12.5 134.75,12.5 D6.1 | v132.25,8.25 135,8.25 R9.1
  Bottom 0.15: v26.5,47 v20.75,47 | v132.25,8.25 128.75,8.25 v124.5,12.5 121.75,15.25 85.75,15.25 84.75,16.25 v83.5,16.25 81,16.25 78.5,18.75 v78.5,19.5
EPD_DC  (via drill 0.3)
  Top 0.15: v84,14 84,15.25 J1.11 | TP11.TP 97,7.25 v96,8.25 93.75,10.5 v49.5,10.5 | v13,47 13,48.25 U2.5
  Bottom 0.15: v84,14 90.25,14 v96,8.25 | v49.5,10.5 v13,47
EPD_RST  (via drill 0.3)
  Top 0.15: 93.75,15.75 102.25,7.25 TP12.TP | 93.75,15.75 92.75,16.75 85.25,16.75 84.5,16 84.5,15.5 J1.10 | v19.75,62.5 17,65.25 17,65.75 U2.21 | v76,33.25 v46.75,62.5 | 93.75,15.75 v95.5,17.5
  Bottom 0.15: v46.75,62.5 v19.75,62.5 | v76,33.25 86.25,33.25 95.5,24 v95.5,17.5
FLASH_CS  (via drill 0.3)
  Top 0.15: v131.75,8.75 131.25,8.25 R5.1 | v131.75,11 131,11.75 D9.1 | v27.5,59.5 33,59.5 U1.1 | v21.75,53.75 21.75,48.5 U2.12
  Bottom 0.15: v131.75,8.75 v131.75,11 126.75,11 90,47.75 37.25,47.75 33.75,51.25 26.25,51.25 22.75,54.75 | v21.75,53.75 22.75,54.75 | 22.75,54.75 v27.5,59.5
GDR  (via drill 0.3)
  Top 0.15: v87.25,13 88.5,14.25 88.5,15.25 J1.2 | v65.75,17.5 65.75,18.5 R4.1 65.5,18.75 64,18.75 62.75,20 Q3.1
  Bottom 0.15: v87.25,13 86.75,12.5 70.75,12.5 v65.75,17.5
GND  (via drill 0.3, 0.35)
  Top 0.15: 32.5,56.5 33,56 U1.4 | 32.5,56.5 32.5,57.5 37,57.5 U1.9 | 12.5,54.5 12.5,55.5 U2.29_2 | 13.75,54.5 13.75,55.5 U2.29_5 | 12.5,54.5 13.5,54.5 U2.29_4 13.75,54.5 | 12.5,54.5 U2.29_1 | 13.75,54.5 14.75,54.5 U2.29_7 15,54.5 15,55.5 U2.29_8 15,55.75 | 15,55.75 15,56.75 U2.29_9 14.75,57 13.75,57 U2.29_6 13.5,57 12.5,57 U2.29_3 12.25,57 12.25,60.5 8,64.75 8,65.75 U2.28 8,66 8,76.25 15.5,83.75 15.5,85 J4.G1 15.5,85.25 15.5,86.25 14.75,87 14.75,90 15.5,90.75 J4.G2 15.75,91 v27.75,103 | 32.5,56.5 28.25,56.5 27.5,55.75 15,55.75 | 4.5,92.75 5,92.75 J4.P6 4.5,92.75 | 4.5,92.75 2.5,94.75 2.5,95.25 J4.G4 2.5,95.5 2.5,96.75 7,101.25 12,101.25 | 4.5,92.75 1.5,89.75 1.5,82.5 J4.G3 | 22.25,106.75 21,108 20.25,108 C5.2 20,108 18.25,108 17,106.75 TP4.TP 16.75,106.5 12,101.75 12,101.25 | 22.25,106.75 25.75,106.75 RESET_BUTTON.2 25.75,107 26.25,107 v27,107.75 | 22.25,106.75 RESET_BUTTON.1 | 12,101.25 12,100.75 C9.2 | C6.2 45.75,108 47,106.75 BOOT_BUTTON.1 47.25,106.75 50.5,106.75 BOOT_BUTTON.2 50.75,107 51.25,107.5 v58.5,107.5 | 68.5,107 74.75,107 TP5.TP | 68.5,107 68,107.5 66.5,107.5 66,107 CHANGE_BUTTON.2 65.75,106.75 62.5,106.75 CHANGE_BUTTON.1 62.25,106.75 61,108 C10.2 60.75,108.25 v60,107.5 | C10_SUPERCAP.1 97,54.25 96.75,54 92.25,54 C8.2 92,53.75 v91.25,53.75 | IC1.3 48.5,91.25 50.25,91.25 50.75,91.75 56.25,91.75 56.5,91.5 C_DELAY.2 | D3.1 77.25,39.5 v77.25,51 77.25,70.75 56.75,91.25 C_DELAY.2 | v84.5,51 84.5,52.25 U3.13 | 68.5,107 68.5,103.25 56.75,91.5 C_DELAY.2 | 79.75,13.5 81,14.75 81,15.25 J1.17 81,15.5 81,17.75 v80.5,18.25 79.75,19 EPD_C10.2 79.5,19 77,19 EPD_C11.2 76.75,19.25 74.25,19.25 EPD_C12.2 74,19 73.75,18.75 67,18.75 R4.2 66.75,18.5 66.75,17.75 62.5,13.5 57.75,13.5 R2.1 57.5,13.25 55.75,13.25 55,12.5 53.5,12.5 53,13 53,13.5 SJ1.1 52.75,13.75 52.25,14.25 52.25,28
  Top 0.15: 79.75,13.5 79.25,13 76.75,13 J1.MP2 | 84.75,14 84.25,13.5 v80.85,13.5 79.75,13.5 | 84.75,14 85.5,14.75 85.5,15.25 J1.8 | 84.75,14 86.25,12.5 87.5,12.5 87.75,12.75 90,12.75 J1.MP1 | 52.25,28 52.75,28.5 EPD_C2.2 | 52.25,28 27.75,28 8,47.75 8,48.25 U2.1 | C7.2 99.25,41.5 103,41.5 112.5,51 115.5,51 116.75,49.75 C1_BAT.2 117,49.75 118.5,51.25 128.25,51.25 | U4.4 136,51.75 136.25,51.75 136.75,52.25 U4.9 | U4.6 137.75,52.25 137,52.25 U4.9 | 136.5,53 137,52.5 U4.9 | 136.5,53 136.25,53.25 136,53.25 U4.1 135.75,53.25 135.5,53.25 135.25,53 131.75,53 C2_BAT.2 131.5,52.75 129.75,52.75 128.25,51.25 | 136.5,53 137.5,54 143.5,54 R2-USB1.1 143.75,54.25 148.75,54.25 150.25,55.75 151,55.75 D1.2 151.25,56 151.5,56 153,57.5 | 136.5,53 U4.9 | 128.25,51.25 127.25,50.25 127.25,49.75 127.75,49.25 128.25,49.25 MCP73831.2 | C5_USB.2 153,48.25 153,51.25 C4_USB.2 152.75,51.5 v152.75,54.5 | 164.25,58 164.25,57.75 J2.B1 | 164.25,59.5 164.5,59.5 J2.MP4 | 164.25,59.5 155.75,59.5 R2-USB.2 155.5,59.25 154.75,59.25 153,57.5 | 164.25,59.5 164.25,58 | 164.25,58 J2.A12 | 164.25,59.5 J2.MP4 | 153,57.5 v152.75,57.5 | J2.MP4 164.75,59.75 168.5,59.75 J2.MP2 168.75,59.5 168.75,49.5 J2.MP1 164.75,49.5 | D8.2 138.75,13.5 135.25,13.5 D6.2 135,13.5 131,13.5 D9.2 130.75,13.25 127.25,13.25 D10.2 127,13 123.5,13 D11.2 123.25,13 119.25,13 D12.2 119.25,13.25 120.5,14.5 120.5,20.5 | EPD_C5.2 90.75,19.25 EPD_C6.2 90.5,19.25 88,19.25 EPD_C7.2 87.75,19.25 85.25,19.25 EPD_C8.2 85,19.25 EPD_C9.2 v81.5,19.25 | 120.5,20.5 120.5,25.9 C1_BAT1.2 120.75,30.57 v120.75,31.5 | EPD_C5.2 94.5,19.25 95.75,20.5 120.5,20.5 | EPD_C5.2
  Top 0.15: EPD_C1.2 99.5,33.75 115.25,33.75 R1_PWRUSB.1 115.5,33.5 120,33.5 121.5,35 123.5,35 IC4.2 123.75,35.25 v124.5,35.25 | SENSOR2.1 153.5,13 153.5,12.25 154,11.75 154,10.25 SENSOR2.7 154,10 154.5,9.5 155.5,9.5 155.75,9.75 155.75,10 SENSOR2.5 156,10.25 163.25,17.5 165,17.5 | C1_BAT2.2 138,33.5 134.5,33.5 133.25,34.75 C3.- 133.25,35 v134.5,36.25 | C2.2 149,5 152.5,5 C1.2 152.75,5.25 154.75,5.25 165.75,16.25 | 164.25,51.25 164.25,51.5 J2.B12 | 155,39.75 149.25,39.75 147.75,41.25 v134.5,41.25 127.25,41.25 R2_BAT.1 | 164.75,49.5 164.25,49 | 164.25,49 155,39.75 | 164.25,49 164.25,51.25 | 164.25,51.25 J2.A1 | 164.25,49 J2.MP3 164.75,49.5 | 165.75,16.25 166.5,17 166.5,28.25 155,39.75 | v165,17 165,17.5 | 165.75,16.25 v166,16 | 165,17.5 J3.1
  Bottom 0.15: v60,107.5 v58.5,107.5 58.25,107.75 27.75,107.75 | v77.25,51 84,51 | 84,51 v84.5,51 | 89.5,52 87.25,49.75 85.25,49.75 84,51 | 89.5,52 v91.25,53.75 | 27.75,107.75 v27,107.75 | 27.75,107.75 v27.75,103 | v152.75,57.5 v152.75,54.5 | v134.5,41.25 v134.5,36.25 133.5,35.25 v124.5,35.25 v120.75,31.5 119,31.5 101.75,48.75 92.75,48.75 89.5,52 | v166,16 v165,17 | v81.5,19.25 v80.5,18.25
  other vias: 33.15,79.65 41.4,101.85 14.95,64.15 21.45,60.9 19.25,50.55 23,53.5 27.65,50.15 74.55,26.4 85.85,37.35 107.3,18.35 136.65,7.75 157.8,56.15 54.85,31.95 16.6,30.2 33.35,38.15 26.45,53.4 17.1,55.9 42.95,53.4 59.25,58.85 90.85,25.35 93.35,31.4 94.1,21.2 102,11.85 128.85,10.1 160.9,16.2 87.35,55.65 94.15,13.45 93.85,16.65
  pour Top: 73.96,10.06 73.98,10.08 92.22,10.08 92.24,10.06 92.26,10.04 92.28,10.02 92.28,0.08 170.12,0.08 170.12,67.12 92.18,67.12 92.16,67.14 92.14,67.16 92.12,67.18 92.12,111.12 69.23,111.12 69.23,109.13 69.21,109.11 69.19,109.09 69.17,109.07 19.33,109.07 19.31,109.09 19.29,109.11 19.27,109.13 19.27,111.12 0.08,111.12 0.08,67.03 6.72,67.03 6.74,67.01 6.76,66.99 6.78,66.97 6.78,47.18 6.76,47.16 6.74,47.14 6.72,47.12 0.08,47.12 0.08,0.08 73.92,0.08 73.92,10.02 73.94,10.04
  pour Bottom: 73.96,10.06 73.98,10.08 92.22,10.08 92.24,10.06 92.26,10.04 92.28,10.02 92.28,0.08 170.12,0.08 170.12,67.12 92.18,67.12 92.16,67.14 92.14,67.16 92.12,67.18 92.12,111.12 69.23,111.12 69.23,109.13 69.21,109.11 69.19,109.09 69.17,109.07 19.33,109.07 19.31,109.09 19.29,109.11 19.27,109.13 19.27,111.12 0.08,111.12 0.08,67.03 6.72,67.03 6.74,67.01 6.76,66.99 6.78,66.97 6.78,47.18 6.76,47.16 6.74,47.14 6.72,47.12 0.08,47.12 0.08,0.08 73.92,0.08 73.92,10.02 73.94,10.04
GPIO8
  Top 0.15: R1.2 19.5,45.5 19.5,48.25 U2.10
I2C_PW  (via drill 0.3)
  Top 0.15: SENSOR2.6 154.75,10.25 154.75,12.25 154,13 SENSOR2.2 154.25,13.25 153.5,14 153,14 152.75,13.75 152.75,12.5 153.25,12 153.25,10.25 SENSOR2.8 153.5,10 153.5,9.75 154.25,9 157,9 v164.5,16.5 | C2.1 149,3.75 152.5,3.75 C1.1 152.75,3.75 155,3.75 156,4.75 R2-PINH.2 156.25,5 159.25,5 R1_PINH.2 159.5,5.25 v164.5,10.25 | v23,64.25 22,65.25 22,65.75 U2.17
  Bottom 0.15: v23,64.25 139.75,64.25 149.25,54.75 149.75,54.75 164.5,40 v164.5,16.5 v164.5,10.25
INT_RTC  (via drill 0.3)
  Top 0.15: v95,59.75 93.75,61 R1_PINH1.1 93.5,61 v89,61 | v98.25,59.75 98.25,60.5 97.75,61 TP15.TP | v32.75,55 31,55 30.25,54.25 20.75,54.25 17,50.5 17,48.5 U2.8 | v85.75,59.75 85.75,61.75 U3.3
  Bottom 0.15: v98.25,59.75 v95,59.75 | v32.75,55 81,55 v85.75,59.75 87,61 v89,61
IO/BOOT  (via drill 0.3)
  Top 0.15: R_BOOT.2 52,108.25 50.75,108.25 BOOT_BUTTON.3 50.5,108.25 47.25,108.25 BOOT_BUTTON.4 47,108.5 46.75,108.75 45.25,108.75 45,108.5 45,107.5 | 45,107.5 45.5,107 C6.1 | v24.5,67.5 24.5,66 U2.15 | 45,107.5 v44.75,107.25
  Bottom 0.15: v24.5,67.5 24.5,87 v44.75,107.25
IO/CHANGE  (via drill 0.3)
  Top 0.15: R_CHANGE.2 67.25,108.25 66,108.25 CHANGE_BUTTON.3 65.75,108.25 62.5,108.25 CHANGE_BUTTON.4 62.25,108.5 62,108.75 59.5,108.75 59,108.25 59,107.75 59.75,107 | 59.75,107 60.75,107 C10.1 | v44.25,96.5 14.25,66.5 14.25,66 U2.23 | 59.75,107 v54.75,107
  Bottom 0.15: v54.75,107 v44.25,96.5
MISO  (via drill 0.3)
  Top 0.15: 6,94 7.25,95.25 7.25,99.75 TP6.TP | 6,94 5.75,93.75 5.25,93.75 J4.P7 | v120,7.75 119.25,7.75 R8.1 119,7.5 104.75,7.5 103,5.75 100.5,5.75 94.75,11.5 v53.75,11.5 | D12.1 v120,10.75 | 15.75,58.75 9.25,65.25 9.25,65.75 U2.27 9,66 v9,69.25 | 15.75,58.75 18.25,56.25 27.5,56.25 29.5,58.25 33,58.25 U1.2 | 15.75,58.75 v15,58 | v6.75,93.25 6,94
  Bottom 0.15: v120,10.75 v120,7.75 | v53.75,11.5 15,50.25 v15,58 | v6.75,93.25 6.75,71.5 v9,69.25
MOSI  (via drill 0.3)
  Top 0.15: v82.5,14 82.5,15.25 J1.14 | v99.75,3.75 123,3.75 TP7.TP | v124.25,7.75 123.25,7.75 R7.1 | v123.5,10 123.5,11.5 D11.1 | v34.75,49.5 41,55.75 U1.5 | v16.5,49.5 15.5,48.5 U2.7 | v4,70 4,88.25 5,89.25 J4.P3
  Bottom 0.15: 123.5,7.75 120.75,7.75 116.75,3.75 v99.75,3.75 90,13.5 83.75,13.5 83.25,14 v82.5,14 70.75,14 37.5,47.25 37,47.25 v34.75,49.5 v16.5,49.5 15.5,50.5 15.5,58.75 6.75,67.5 6.5,67.5 v4,70 | 123.5,7.75 v124.25,7.75 | 123.5,7.75 v123.5,10
N$1  (via drill 0.3)
  Top 0.15: v149.25,55.5 143.75,55.5 R2-USB1.2 | v153.25,53.25 164,53.25 J2.A5
  Bottom 0.15: v149.25,55.5 151,55.5 v153.25,53.25
N$2
  Top 0.15: R2-USB.1 155.75,58 161.75,58 163.25,56.5 164,56.5 J2.B5
N$3  (via drill 0.3)
  Top 0.15: IC4.3 123.75,34.5 124.5,34.5 125,35 125,35.5 124.5,36 123.75,36 IC4.1 123.5,36 121.25,36 D2.1 119.75,34.75 v119,34 | v119,32.25 119,30.63 C1_BAT1.1 | v133.25,43.25 134,43.25 Q1.2
  Bottom 0.15: v119,32.25 v119,34 128.25,43.25 v133.25,43.25
N$4  (via drill 0.3)
  Top 0.15: v93.25,38 94,37.25 C4.1 | v88.25,38 87.5,38 D4.1 | v83.25,39.5 D3.2
  Bottom 0.15: v93.25,38 v88.25,38 86.75,39.5 v83.25,39.5
N$6  (via drill 0.3)
  Top 0.15: v121.75,46.5 121.75,45.75 R1_BAT.1 | v128.75,47.5 128.25,48 MCP73831.1
  Bottom 0.15: v121.75,46.5 127.75,46.5 v128.75,47.5
N$7  (via drill 0.3)
  Top 0.15: v121.5,50.75 121.5,49.75 CHG_LED.C | v121.5,47.5 122.75,46.25 122.75,45.75 R1_BAT.2
  Bottom 0.15: v121.5,47.5 v121.5,50.75
N$8
  Top 0.15: R2_BAT.2 127.25,46.5 125.75,48 MCP73831.5
N$9
  Top 0.15: J1.24 77.5,15.5 76.5,15.5 74.25,17.75 EPD_C12.1
N$10
  Top 0.15: J1.22 78.5,15.5 78.5,17.25 79,17.75 79.5,17.75 EPD_C10.1
N$11  (via drill 0.3)
  Top 0.15: v79.5,16.25 79.5,15.5 J1.20 | v84.25,18.75 85,18 EPD_C8.1
  Bottom 0.15: v79.5,16.25 79,16.25 77.5,17.75 77.5,19.75 78.25,20.5 82.5,20.5 v84.25,18.75
N$12  (via drill 0.3)
  Top 0.15: v80.5,17.5 80,17 80,15.5 J1.19 | v86.5,17.75 87.75,17.75 EPD_C7.1
  Bottom 0.15: v80.5,17.5 86.25,17.5 v86.5,17.75
N$13  (via drill 0.3)
  Top 0.15: v90.5,16.25 90.5,12.25 90.25,12 76.5,12 76,12.5 76,13.25 76.25,13.5 79.25,13.5 80.5,14.75 80.5,15.25 J1.18 | v89.75,17.75 90.5,17.75 EPD_C6.1
  Bottom 0.15: v90.5,16.25 90.5,17 v89.75,17.75
N$14  (via drill 0.3)
  Top 0.15: v86.75,16.25 87,16 87,15.5 J1.5 | v61.25,35.75 53,27.5 EPD_C2.1
  Bottom 0.15: v86.75,16.25 87.25,15.75 94.5,15.75 96,17.25 96,37.5 93.5,40 65.5,40 v61.25,35.75
N$15  (via drill 0.3)
  Top 0.15: v87.5,16.25 87.5,15.5 J1.4 | v95,23.75 95,28 99.25,32.25 EPD_C1.1
  Bottom 0.15: v87.5,16.25 v95,23.75
N$16  (via drill 0.3)
  Top 0.15: v88.75,65.75 R_CAPACITOR.2 | v86.25,68.25 87,67.5 D7.1
  Bottom 0.15: v86.25,68.25 v88.75,65.75
N$17
  Top 0.15: IC1.5 51.25,93 56.25,93 56.5,92.75 C_DELAY.1
PREVGH  (via drill 0.3)
  Top 0.15: v79,17 79,15.5 J1.21 | v83.25,18.5 82.5,17.75 EPD_C9.1 | v81.75,20 87.25,25.5 87.25,32.25 D5.1
  Bottom 0.15: v79,17 79,17.75 78,18.75 78,19.75 78.25,20 v81.75,20 v83.25,18.5
PREVGL  (via drill 0.3)
  Top 0.15: J1.23 78,15.5 78,16.75 77,17.75 EPD_C11.1 76.75,18 v76,18.75 | v79,21.75 84,26.75 84,30.5 90.75,37.25 90.75,37.75 D4.2
  Bottom 0.15: v76,18.75 v79,21.75
RESE  (via drill 0.3)
  Top 0.15: v86.5,13 88,14.5 88,15.25 J1.3 | v64.5,19.5 64,20 Q3.2 63.75,20.25 63,21 62.25,21 60,18.75 55.5,18.75 R3.1
  Bottom 0.15: v86.5,13 71,13 v64.5,19.5
RESE'
  Top 0.15: 54.25,14.75 54.25,13.75 SJ1.2 | 54.25,14.75 54.25,18.5 R3.2 | 54.25,14.75 57.5,14.75 R2.2
RESET  (via drill 0.3)
  Top 0.15: 24,108.25 25.75,108.25 RESET_BUTTON.3 | 24,108.25 22.25,108.25 RESET_BUTTON.4 | v20.75,106 20.25,106.5 C5.1 | v27.25,106 28,106.75 R_RESET.2 28.25,106.75 34.75,106.75 48.25,93.25 IC1.1 | v16,54.25 11,49.25 11,49 10.5,48.5 U2.3 | v24,107.25 24,108.25
  Bottom 0.15: v27.25,106 24,106 | 24,106 v20.75,106 19.25,104.5 19.25,61.5 20,60.75 20,54.5 19.75,54.25 v16,54.25 | 24,106 v24,107.25
RTC_RST  (via drill 0.3)
  Top 0.15: v28.5,60 23.25,65.25 23.25,65.75 U2.16 | v84.5,60 84.5,61.75 U3.4
  Bottom 0.15: v28.5,60 45.75,60 48.75,57 81.5,57 v84.5,60
RX
  Top 0.15: U2.24 13,66 13,73 17,77 TP2.TP
SCK  (via drill 0.3)
  Top 0.15: v83,14.5 83,15.25 J1.13 | v124.5,11.75 127,11.75 D10.1 | v126.25,8.5 127,7.75 R6.1 | v127,6.5 127,4 TP8.TP | v41.25,57.75 41.25,57.25 U1.6 | v24,55.25 19.25,55.25 19,55 | 19,55 14.25,50.25 14.25,48.5 U2.6 | v4,91.25 5,91.25 J4.P5 | 19,55 v18.75,55.25 | v45,57.75 v55.5,47.25
  Bottom 0.15: v127,6.5 127,7.75 v126.25,8.5 126.25,10 v124.5,11.75 121.75,14.5 v83,14.5 79.5,14.5 55.5,38.5 v55.5,47.25 | v24,55.25 26.5,57.75 v41.25,57.75 v45,57.75 | v4,91.25 4,70.75 18.75,56 v18.75,55.25
SCL  (via drill 0.3)
  Top 0.15: v138.75,52.75 138,52.75 U4.7 | v163.5,22.25 165,20.75 J3.4 | v157,4.5 156.25,3.75 R2-PINH.1 | v156,12.25 156,13 SENSOR2.4 | v26.5,56.75 18.25,65 18.25,65.75 U2.20 | v87,50.75 88,51.75 88,52 | 88,52 88,52.25 U3.16 88,52 | 88,52 v90.25,52
  Bottom 0.15: 138.75,52 138.75,47 163,22.75 | 138.75,52 v138.75,52.75 | v163.5,22.25 163,22.75 | v157,4.5 157,11.25 v156,12.25 154.5,13.75 154.5,14.25 163,22.75 | v26.5,56.75 31,52.25 84.5,52.25 86,50.75 v87,50.75 | v90.25,52 138.75,52
SDA  (via drill 0.3)
  Top 0.15: v139.5,52.75 139,53.25 138,53.25 U4.8 | v164,20.5 165,19.5 J3.3 | v164,8.5 159.5,4 R1_PINH.1 | v155,14 155,13.25 SENSOR2.3 | v27.25,56.75 19.5,64.5 19.5,65.75 U2.19 | v86.25,51.25 86.25,51.75 86.75,52.25 U3.15
  Bottom 0.15: 164,14 v164,20.5 164,22.5 139.5,47 v139.5,52.75 132,60.25 89.75,60.25 82.25,52.75 | 164,14 v164,8.5 | 164,14 v155,14 | v27.25,56.75 29.75,54.25 29.75,54 31,52.75 82.25,52.75 | 82.25,52.75 84.75,52.75 v86.25,51.25
SRC  (via drill 0.3)
  Top 0.15: v95,37.75 94.25,38.5 C4.2 | v91,33.75 91,32.5 D5.2 | v69,28 63.25,22.25 Q3.3 | v78.1,34.55 77.33,34.55 L1.1
  Bottom 0.15: v95,37.75 v91,33.75 78.1,33.75 | v69,28 74.75,33.75 78.1,33.75 | 78.1,33.75 v78.1,34.55
SS_SD  (via drill 0.3)
  Top 0.15: v138.25,8.5 138.75,8 R10.1 | v138.25,11.25 139,12 D8.1 | v17.5,54.75 v13.5,50.75 11.75,49 11.75,48.5 U2.4 | v6.25,71.25 6.25,87.5 5.75,88 J4.P2
  Bottom 0.15: v138.25,11.25 v138.25,8.5 133.25,8.5 128,3.25 99.5,3.25 91.75,11 53.25,11 v13.5,50.75 | v17.5,54.75 19,54.75 19.25,55 19.25,58.25 v6.25,71.25
TX
  Top 0.15: U2.25 11.75,66 11.75,74.75 13.75,76.75 TP1.TP
USB_D+  (via drill 0.3)
  Top 0.15: v98.75,48.25 107.25,56.75 151,56.75 D1.1 | v27.75,51.75 24.5,48.5 U2.14
  Bottom 0.15: v98.75,48.25 37.25,48.25 33.75,51.75 v27.75,51.75
USB_D-  (via drill 0.3)
  Top 0.15: v149.25,54 150.25,55 151,55 D1.3 | v30.75,54 29,52.25 26.75,52.25 23,48.5 U2.13
  Bottom 0.15: v149.25,54 138.75,54 132,60.75 89.5,60.75 82.75,54 v30.75,54
VBAT
  Top 0.3: Q1.3 133.31,45.47 133.31,47.96 133.93,48.58 TP3.TP 133.93,48.72 133.93,52.18 | U4.2 135.8,52.67 135.8,52.25 U4.3 135.66,52.18 133.93,52.18 | MCP73831.3 128.32,50.1 129.71,51.49 131.51,51.49 C2_BAT.1 131.64,51.63 132.2,52.18 133.93,52.18
VBUS
  Top 0.3: D1.5 153.67,55.92 153.25,55.92 152.07,54.74 152.07,51.84 151.8,51.56 C4_USB.1 151.66,51.42 151.66,48.03 C5_USB.1 151.59,47.89 149.09,45.4 149.09,42.56 | 149.09,42.56 149.09,40.41 149.3,40.2 151.03,40.2 153.11,42.28 154.63,42.28 PFMF.050.1.2 | R1_PWRUSB.2 115.44,34.94 117.72,34.94 119.46,36.67 119.87,36.67 D2.2 119.87,36.88 119.87,49.48 | 125.41,49.76 122.85,49.76 CHG_LED.A 122.64,49.76 121.95,49.07 120.77,49.07 120.36,49.48 119.87,49.48 | 125.41,49.76 125.69,50.04 MCP73831.4 | 125.41,49.76 131.85,43.32 132.27,43.32 Q1.1 132.41,43.25 133.1,42.56 149.09,42.56 | 119.87,49.48 118.14,49.48 C1_BAT.1 118,49.41 117.38,48.79 116.34,48.79 115.58,49.55 TP14.TP
VRTC
  Top 0.3: C10_SUPERCAP.2 97.09,52.11 96.67,52.53 92.24,52.53 C8.1 92.1,52.6 89.82,52.6 88.57,53.84 86.28,53.84 | 86.28,53.84 86.28,53.08 85.73,52.53 U3.14 | 86.28,53.84 86.28,62.85 87.39,63.95 87.39,64.79 R_CAPACITOR.1
VUSB
  Top 0.3: J2.A9 164.12,57.1 164.12,56.89 J2.B4 164.26,56.82 164.81,56.82 165.02,56.62 165.02,52.6 164.81,52.39 164.26,52.39 J2.B9 164.12,52.32 164.12,52.11 J2.A4 163.98,52.04 159.9,52.04 150.2,42.35 PFMF.050.1.1